# Altium PCB UWBNode.PcbDoc
Units mil, origin at the board's own origin, x right, y up, seen from the top; angles counter-clockwise.
Board outline 1377.96 x 1377.95 mil, 2 copper layers (Top Layer, Bottom Layer), stack 49.606 mil thick; 43 components, 60 nets, 227 pads, 157 vias.
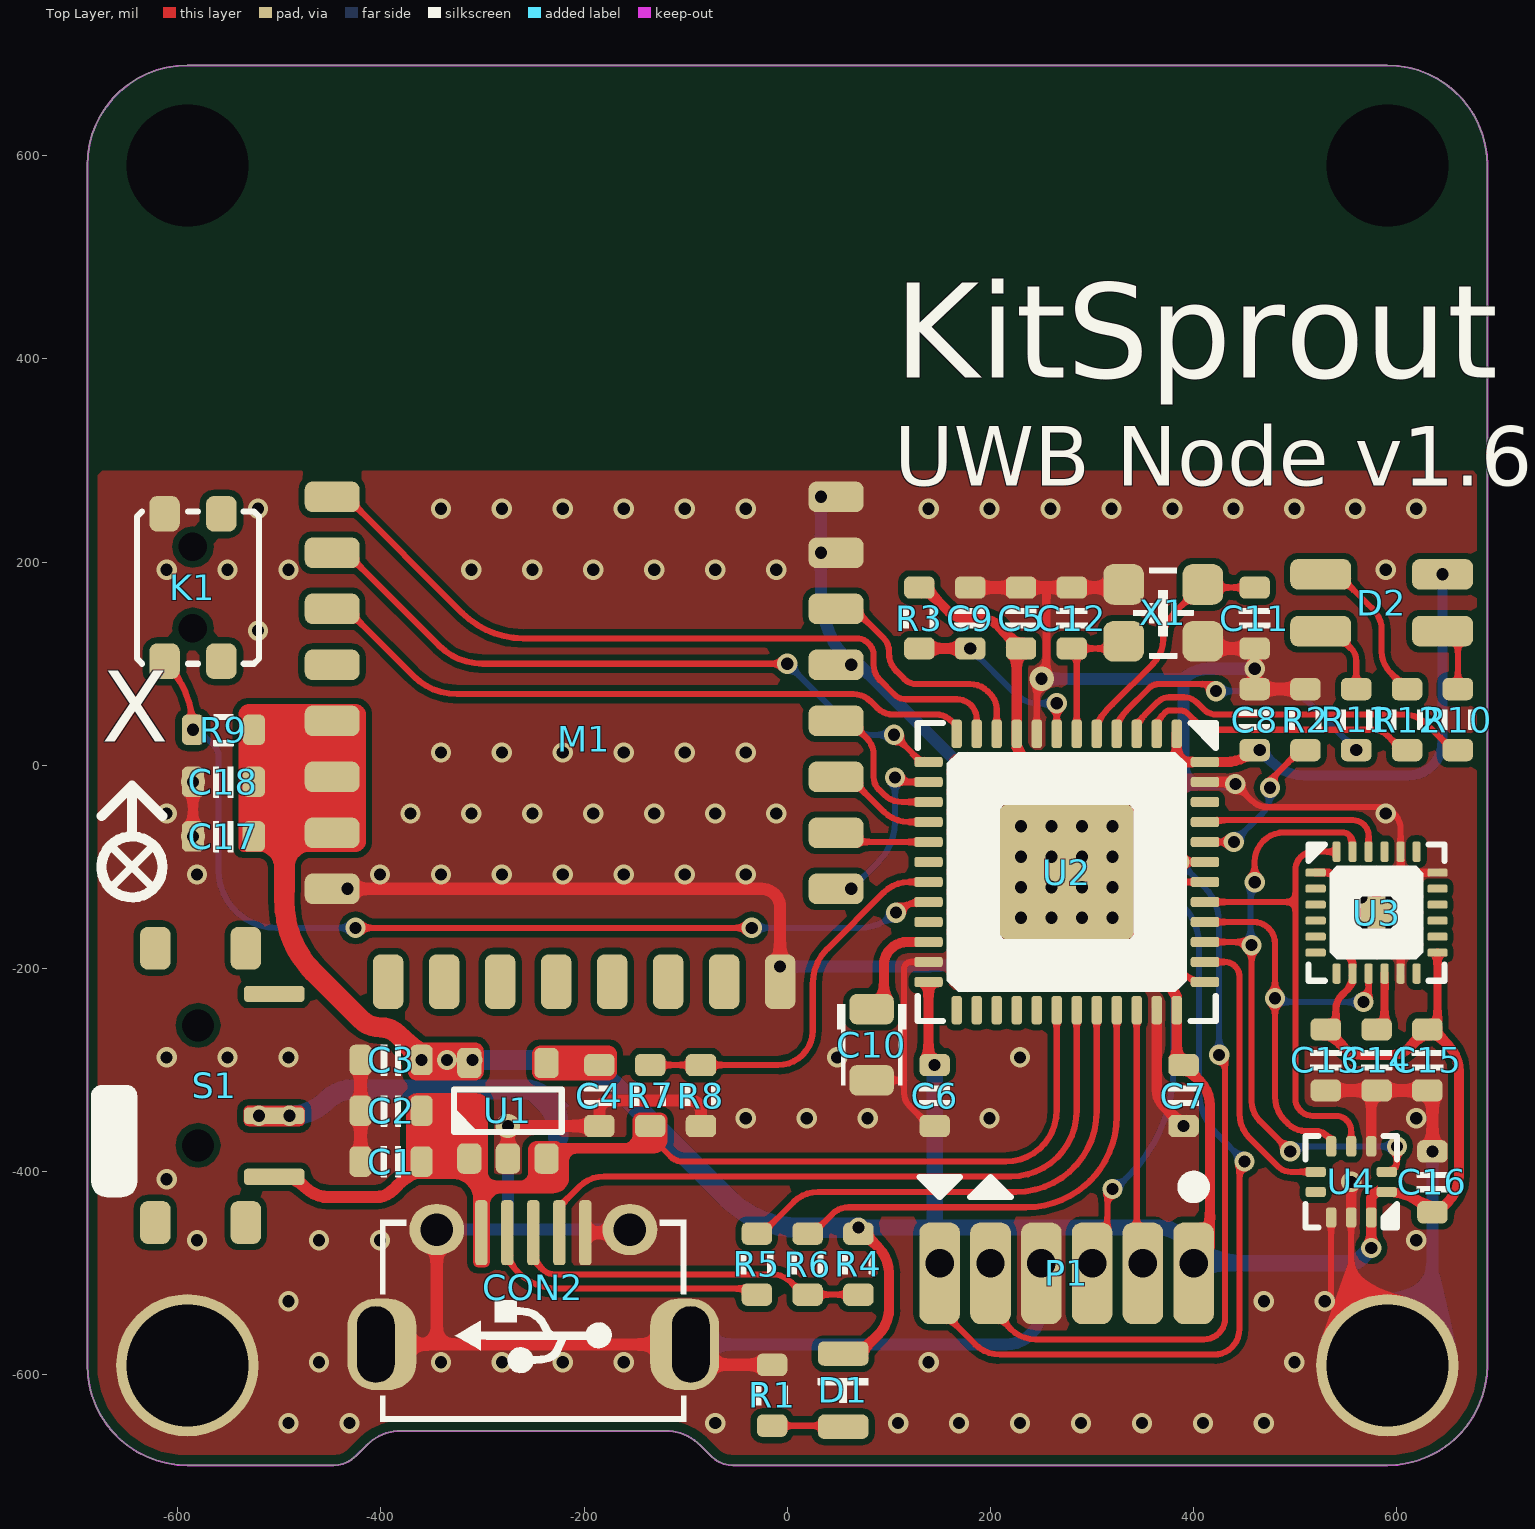
[diagram p0: Top Layer view]
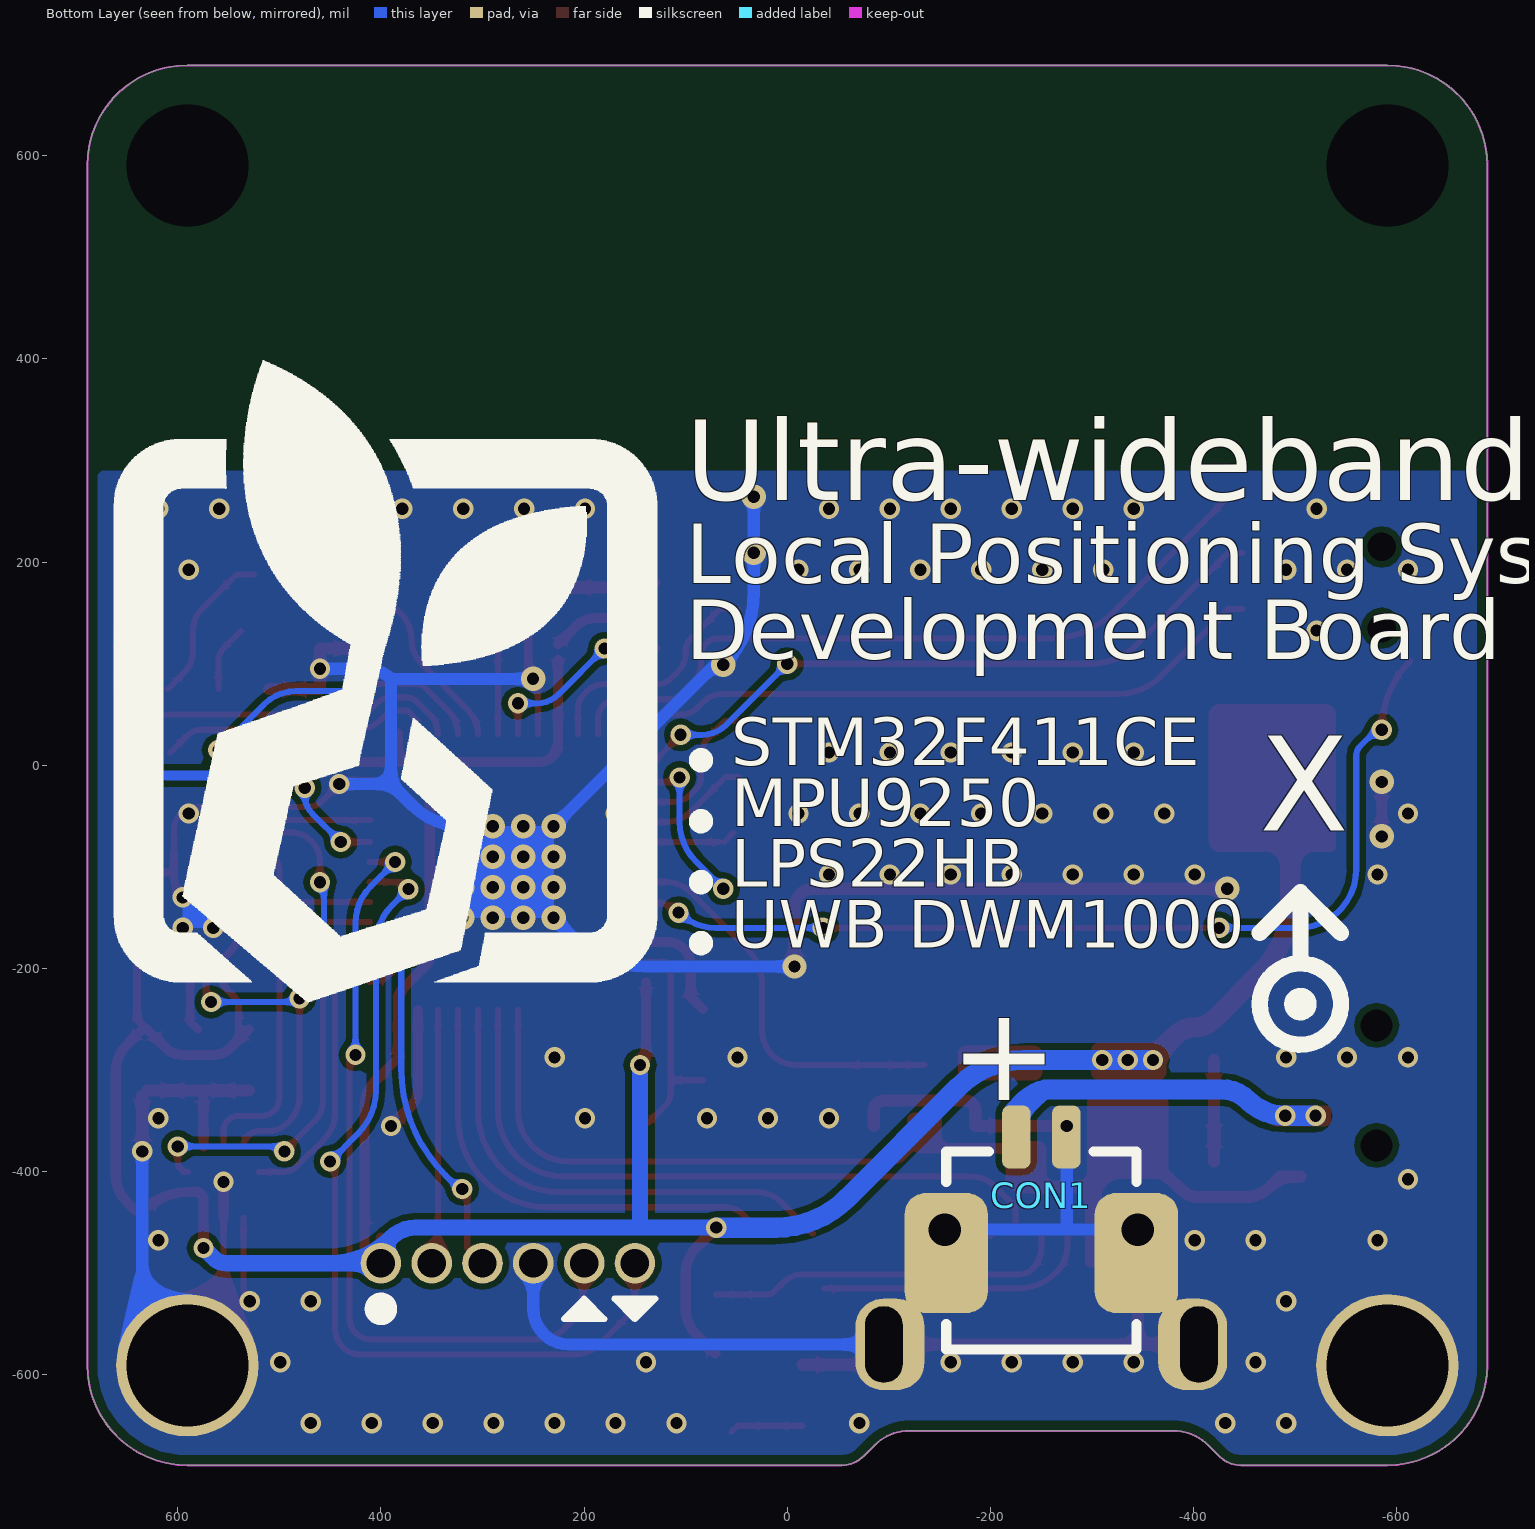
[diagram p1: Bottom Layer view, seen from below]
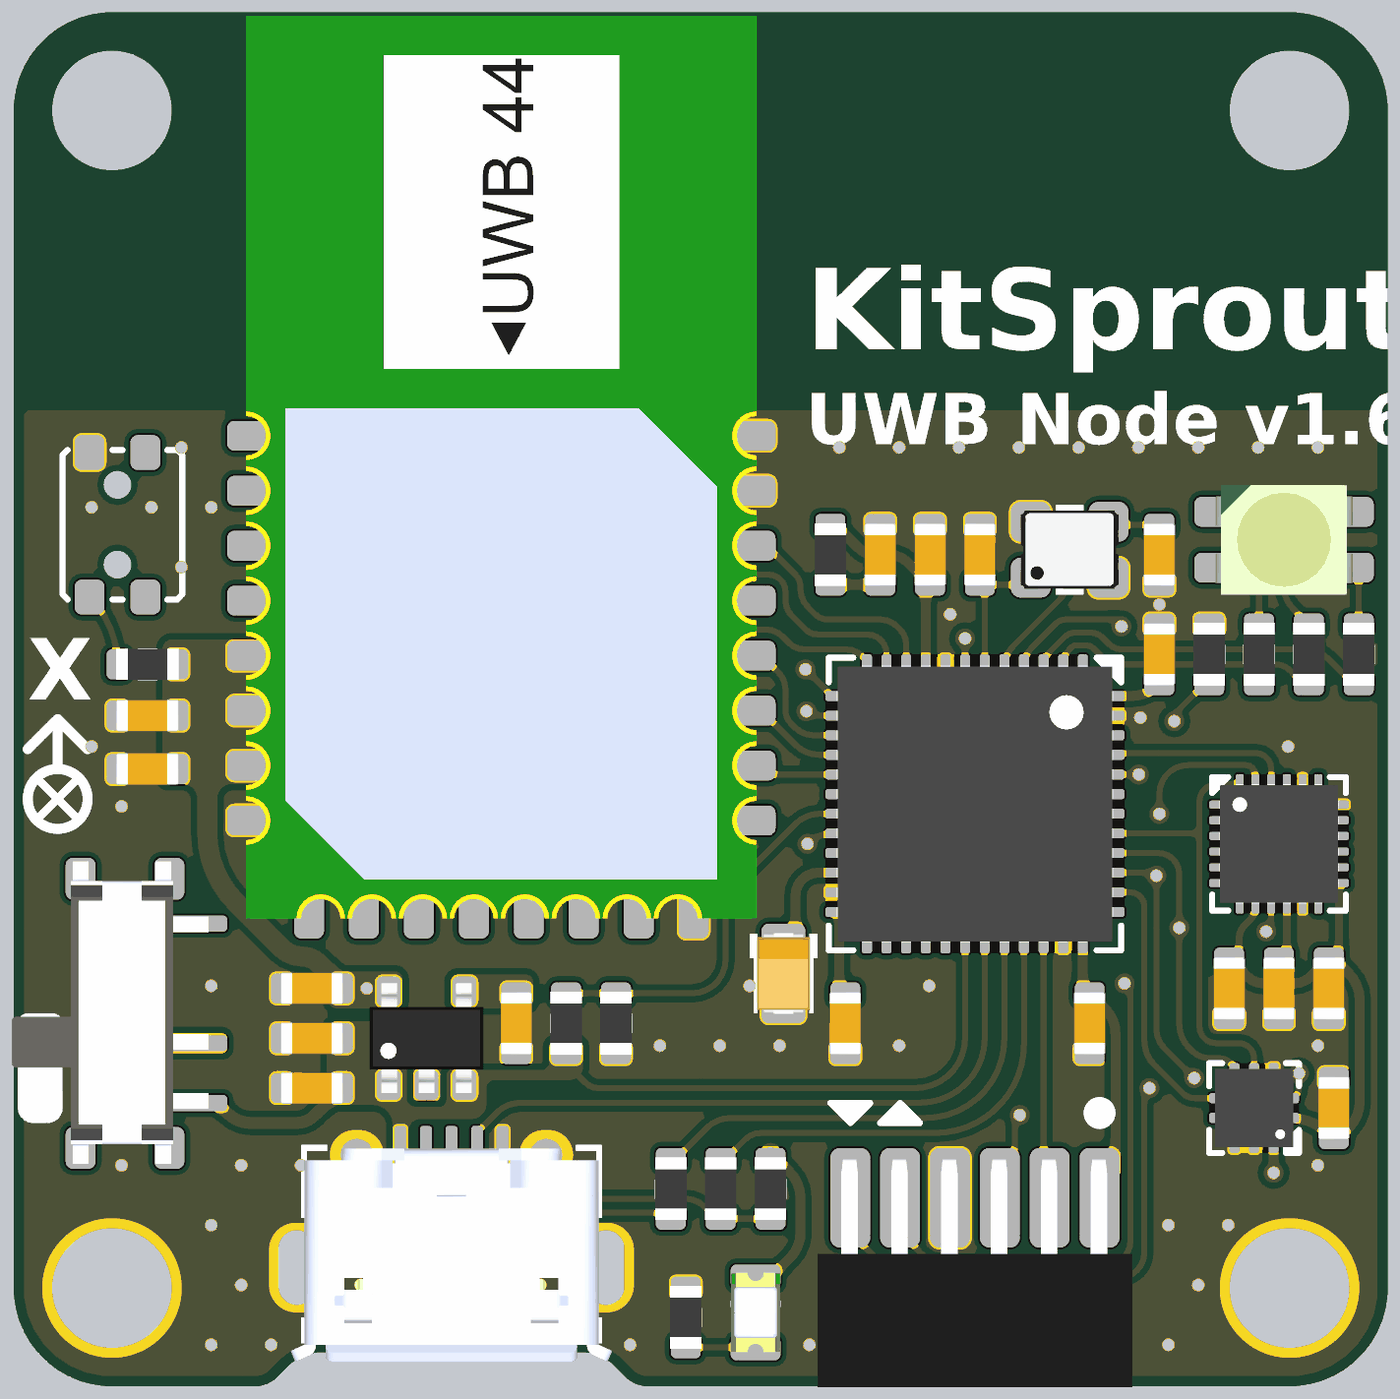
[diagram p2: 3D render of the assembled board from above, using the file's embedded part models]

## Layer stack, top to bottom
Top Solder: solder mask 0.3937, Solder Resist, Dk 3.5
Top Layer: signal copper 1.1811
Dielectric 1: dielectric 47.2441, FR-4, Dk 4.8
Bottom Layer: signal copper 1.1811
Bottom Solder: solder mask 0.3937, Solder Resist, Dk 3.5

## Board outline
-590.55,-688.98 -446.67,-688.98 ccw(c-446.67,-658.33) -425,-680 -414.14,-669.14 cw(c-380,-703.28) -380,-655 -120,-655 cw(c-120,-703.28) -85.86,-669.14 -75,-680 ccw(c-53.33,-658.33) -53.33,-688.98 590.55,-688.98 ccw(c590.55,-590.55) 688.98,-590.55 688.98,590.55 ccw(c590.55,590.55) 590.55,688.98 -590.55,688.98 ccw(c-590.55,590.55) -688.98,590.55 -688.98,-590.55 ccw(c-590.55,-590.55)

## Design rules (kind name [scope] priority, off if disabled: settings)
BoardOutlineClearance [All] p1: gap=10 ignorepadtopadclearanceinfootprint=FALSE except(0: Arc-SplitContinuation Track-SplitContinuation SMDPad-SplitContinuation THPad-SplitContinuation Via-SplitContinuation Fill-SplitContinuation Poly-SplitContinuation Region-SplitContinuation Text-SplitContinuation)
Clearance ClearancePolygon [InPolygon] p1: gap=6 ignorepadtopadclearanceinfootprint=FALSE except(0: SMDPad-Hole THPad-Hole Via-Hole Fill-Hole Poly-Hole Region-Hole Text-Hole; 8: THPad-Fill)
Clearance [All] p2: gap=6 ignorepadtopadclearanceinfootprint=FALSE except(0: Arc-Hole Track-Hole SMDPad-Hole THPad-Hole Via-Hole Fill-Hole Poly-Hole Region-Hole Text-Hole)
ComponentClearance [All] p1: gap=0 collisioncheckmode=3 verticalgap=0 showdistances=FALSE
Height [All] p1: minheight=0 maxheight=5000 prefheight=500
HoleSize [All] p1: absolutevalues=TRUE maxlimit=200 minlimit=1 maxpercent=80.000 minpercent=20.000
HoleToHoleClearance [All] p1: gap=6 allowstackedmicrovias=TRUE
MinimumAnnularRing [All] p1: minimumring=4
MinimumSolderMaskSliver [All] p1: minsoldermaskwidth=0
PolygonConnect [All] p1: connectstyle=Direct reliefconductorwidth=10 reliefentries=4 polygonreliefangle="90 Angle" airgapwidth=10
RoutingVias [All] p1: holewidth=12 width=24 viastyle="Through Hole" minholewidth=12 minwidth=20 maxholewidth=28 maxwidth=50
SilkToSilkClearance [All] p1: silktosilkclearance=0
SilkToSolderMaskClearance [IsPad] p1: minsilkscreentomaskgap=0 clearancetoexposedcopper=TRUE
SolderMaskExpansion [All] p1: expansion=2
Width [All] p1: maxlimit=100 minlimit=6 preferedwidth=10
23 further rules are at their usual default settings.

## Classes and differential pairs
component class "[06] ULTRA WIDEBAND": C17 C18 M1
component class "[05] INERTIAL SENSOR": C13 C14 C15 C16 U3 U4
component class "[04] MICROCONTROLLER": C5 C6 C7 C8 C9 C10 C11 C12 CON2 D2 K1 P1 R2 R3 R4 R5 R6 R7 R8 R9 R10 R11 R12 U2 X1
component class "[03] POWER": C1 C2 C3 C4 CON1 D1 R1 U1

## Components (designator, comment, footprint, x,y, rotation, side; value= is the part's Value field where it differs from the comment)
C1 "10uF" CAP_0603 -390,-390 r0 top
C2 "2.2uF" CAP_0603 -390,-340 r0 top
C3 "2.2uF" CAP_0603 -390,-290 r0 top
C4 "10nF" CAP_0603 -185,-325 r90 top
C5 "0.1uF" CAP_0603 230,145 r270 top
C6 "0.1uF" CAP_0603 145,-325 r90 top
C7 "0.1uF" CAP_0603 390,-325 r90 top
C8 "0.1uF" CAP_0603 460,45 r270 top
C9 "0.1uF" CAP_0603 180,145 r270 top
C10 "2.2uF" CAP_TAN_P0805 83,-275 r270 top
C11 "10pF" CAP_0603 460,145 r90 top
C12 "10pF" CAP_0603 280,145 r270 top
C13 "10nF" CAP_0603 530,-290 r90 top
C14 "0.1uF" CAP_0603 580,-290 r90 top
C15 "0.1uF" CAP_0603 630,-290 r90 top
C16 "0.1uF" CAP_0603 635,-410 r270 top
C17 "10uF" CAP_0603 -555,-70 r0 top
C18 "1uF" CAP_0603 -555,-16.34 r0 top
CON1 "MX1.25_2P" MX1.25_S90_2P -250,-480 r180 bottom
CON2 "MicroUSB" USB_Micro-AB -250,-560 r180 top locked
D1 "WHITE" LED_0805_YELLOW 55,-615 r270 top
D2 "RGB" LED_3528_RGB 585,160 r0 top
K1 "ButtonTACT" ButtonTACT_3.4*3.5_90 -585,175 r90 top
M1 "DWM1000" DWM1000 -200,-220 r0 top locked
P1 "DIP 1x6" HDR1X6_1.27_180HF 400,-500 r270 top value=1.27
R1 "1K" RES_0603 -15,-620 r270 top
R2 "10K" RES_0603 510,45 r270 top
R3 "10K" RES_0603 130,145 r90 top
R4 "1.5K" RES_0603 70,-491 r90 top
R5 "22R" RES_0603 -30,-491 r90 top
R6 "22R" RES_0603 20,-491 r90 top
R7 "4.7K" RES_0603 -135,-325 r270 top
R8 "4.7K" RES_0603 -85,-325 r90 top
R9 "10K" RES_0603 -555,35 r0 top
R10 "680R" RES_0603 660,45 r90 top
R11 "680R" RES_0603 560,45 r90 top
R12 "680R" RES_0603 610,45 r90 top
S1 "SPDT 3P" SwitchSPDT_2.8X6.6_90 -580,-315 r270 top
U1 "SP6205" SOT23-5 -275,-340 r90 top
U2 "STM32F411CE" QFN_P0.5_48 275,-105 r270 top
U3 "MPU9250" QFN_P0.4_24 580,-145 r0 top
U4 "LPS22HB" HCLGA-2x2_10 555,-410 r180 top
X1 "16MHz" XT_2520_4 370,150 r0 top

## Footprints (in the part's own frame and the unit in brackets; to place one, negate y for a bottom-side part, rotate by r counter-clockwise, add the part's x,y. Pads: shape width x height; smd on the part's side, far side on the other; paste and mask are expansions set on the pad)
ButtonTACT_3.4*3.5_90 [mil]
  round 20 hole 28 unplated: 0(-40,0) 0(40,0)
  rrect50% 35x30 smd: 1(-72.5,28) 2(72.5,28) 3(-72.5,-28) NC(72.5,-28)
  silkscreen extent -75,-65 75,55
CAP_0603 [mil]
  rrect50% 22x30 smd: 1(-30,0) 2(30,0)
  silkscreen extent -10,-15 10,15, body extent -31,-16 31,16, height 31
CAP_TAN_P0805 [mil]
  rrect50% 30x44 smd: 1(-35,0) 2(35,0)
  silkscreen extent -40,-34 40,34, body extent -40,-27 40,27, height 59
DWM1000 [mil]
  rrect50% 54x30 smd: 1(-248,484.25) 2(-248,429.13) 3(-248,374.02) 4(-248,318.9) 5(-248,263.78) 6(-248,208.66) 7(-248,153.54) 8(-248,98.43) 17(248,98.43) 18(248,153.54) 19(248,208.66) 20(248,263.78) 21(248,318.9) 22(248,374.02) 23(248,429.13) 24(248,484.25)
  rrect50% 30x54 smd: 9(-192.91,7) 10(-137.8,7) 11(-82.68,7) 12(-27.56,7) 13(27.56,7) 14(82.68,7) 15(137.8,7) 16(192.91,7)
  body extent -256,0 256,906, height 114
HCLGA-2x2_10 [mil]
  rrect50% 20x10 smd: 1(-35,9.84) 2(-35,-9.84) 6(35,-9.84) 7(35,9.84)
  rrect50% 10x20 smd: 3(-19.69,-35) 4(0,-35) 5(19.68,-35) 8(19.68,35) 9(0,35) 10(-19.69,35)
  silkscreen extent -45,-45 45,45, body extent -39,-39 39,39, height 31
HDR1X6_1.27_180HF [mil]
  rrect50% 100x40 smd: 1(0,0) 2(0,-50) 3(0,-100) 4(0,-150) 5(0,-200) 6(0,-250)
  body extent -38,-283 190,33, height 71
LED_0805_YELLOW [mil]
  rrect50% 24x50 smd: 1(-36,0) 2(36,0)
  silkscreen extent -12,-25 12,24, body extent -40,-25 40,25, height 43
LED_3528_RGB [mil]
  rrect50% 60x30 smd: 1(-60,28) 2(-60,-28) 3(60,-28) 4(60,28)
  body extent -69,-55 69,55, height 75
MX1.25_S90_2P [mil]
  rrect50% 82x118 smd: 0(-93.58,0) 0(93.58,0)
  rrect50% 28x62 smd: 1(-24.61,114) 2(24.61,114)
  silkscreen extent -94,-95 94,100, body extent -147,-129 147,135, height 98
QFN_P0.4_24 [mil]
  rrect50% 20x8 smd: 1(-60,39.37) 2(-60,23.62) 3(-60,7.87) 4(-60,-7.87) 5(-60,-23.62) 6(-60,-39.37) 13(60,-39.37) 14(60,-23.62) 15(60,-7.87) 16(60,7.87) 17(60,23.62) 18(60,39.37)
  rrect50% 8x20 smd: 7(-39.37,-60) 8(-23.62,-60) 9(-7.87,-60) 10(7.87,-60) 11(23.62,-60) 12(39.37,-60) 19(39.37,60) 20(23.62,60) 21(7.87,60) 22(-7.87,60) 23(-23.62,60) 24(-39.37,60)
  rrect20% 32x32 smd: 25(0,0)
  silkscreen extent -67,-67 67,67, body extent -60,-60 60,60, height 39
QFN_P0.5_48 [mil]
  rrect50% 28x10 smd: 1(-136,108.27) 2(-136,88.58) 3(-136,68.9) 4(-136,49.21) 5(-136,29.53) 6(-136,9.84) 7(-136,-9.84) 8(-136,-29.53) 9(-136,-49.21) 10(-136,-68.9) 11(-136,-88.58) 12(-136,-108.27) 25(136,-108.27) 26(136,-88.58) 27(136,-68.9) 28(136,-49.21) 29(136,-29.53) 30(136,-9.84) 31(136,9.84) 32(136,29.53) 33(136,49.21) 34(136,68.9) 35(136,88.58) 36(136,108.27)
  rrect50% 10x28 smd: 13(-108.27,-136) 14(-88.58,-136) 15(-68.9,-136) 16(-49.21,-136) 17(-29.53,-136) 18(-9.84,-136) 19(9.84,-136) 20(29.53,-136) 21(49.21,-136) 22(68.9,-136) 23(88.58,-136) 24(108.27,-136) 37(108.27,136) 38(88.58,136) 39(68.9,136) 40(49.21,136) 41(29.53,136) 42(9.84,136) 43(-9.84,136) 44(-29.53,136) 45(-49.21,136) 46(-68.9,136) 47(-88.58,136) 48(-108.27,136)
  rrect10% 132x132 smd: 49(0,0)
  silkscreen extent -147,-147 147,147, body extent -139,-139 139,139, height 22
RES_0603 [mil]
  rrect50% 22x30 smd: 1(-30,0) 2(30,0)
  silkscreen extent -10,-16 10,16, body extent -31,-16 31,16, height 18
SOT23-5 [mil]
  rrect50% 30x24 smd: 1(-47,38) 2(-47,0) 3(-47,-38) 4(47,-38) 5(47,38)
  silkscreen extent -21,-53 21,53, body extent -55,-57 55,57, height 57
SwitchSPDT_2.8X6.6_90 [mil]
  rrect50% 42x30 smd: 0(-135,-42) 0(-135,47) 0(135,-42) 0(135,47)
  round 10 hole 31.5: 0(-59.06,0) 0(59.06,0)
  rrect50% 16x60 smd: 1(90,75) 2(30,75) 3(-90,75)
  body extent -152,-111 151,86, height 55
USB_Micro-AB [mil]
  rrect80% 68x90 hole 37 slot 75 at 90 deg copper offset 6,0 mask+0: 0(-155,10)
  oval 54x50 hole 32 mask+0: 0(-95,-103) 0(95,-103)
  rrect80% 68x90 hole 37 slot 75 at 90 deg copper offset -6,0 mask+0: 0(155,10)
  rrect50% 12x64 smd: 1(51.18,-100) 2(25.59,-100) 3(0,-100) 4(-25.59,-100) 5(-51.18,-100)
  silkscreen extent -150,-113 151,86, body extent -161,-109 161,104, height 108
XT_2520_4 [mil]
  rrect50% 40x40 smd: 1(39,28) 2(-39,28) 3(-39,-28) 4(39,-28)
  silkscreen extent -30,-44 30,44, body extent -49,-39 49,39, height 31

## Part data
C1 C2 C3 C4 C5 C6 C7 C8 C9 C11 C12 C13 C14 C15 C16 C17 C18: library part Cap_0603, "Capacitor", Type=0603
C10: library part Cap_Tan_0805, "Capacitor Tantalum", Type=0805
CON1: "MX"
CON2: library part USB_Micro, "USB"
D1: library part LED_0805, "LED", Type=0805
D2: library part LED_3528_RGB, "LED", Type=3528
K1: "Button"
M1: "Module", Current - Receiving=64mA, Current - Transmitting=31mA, Frequency="3.5GHz ~ 6.5GHz", Manufacturer="Decawave Limited", Operating Temperature="-40¢XC ~ 85¢XC", Power - Output=-, Supplier Part Number 1=1479-1002-1-ND, Voltage - Supply="2.8 V ~ 3.6 V", Antenna Type="Integrated, Chip", Category="RF/IF and RFID", ComponentLink1Description=http://www.decawave.com/sites/default/files/product-pdf/dwm1000-product-brief.pdf, ComponentLink1URL=http://www.decawave.com/sites/default/files/product-pdf/dwm1000-product-brief.pdf, Data Rate=6.8Mbps, Manufacturer Part Number=DWM1000, Memory Size=-, Modulation=-, Mounting Type="Surface Mount", Package / Case=Module, Packaging="Cut Tape (CT)", Pricing 1="1=32.16, 10=26.704, 100=24.24, 250=22.51296 (USD)", Protocol=-, RF Family/Standard=802.15.4, RoHS="RoHS Compliant", Sensitivity=-, Serial Interfaces=SPI, Stock 1=1028, Supplier 1=Digi-Key
P1: library part HDR1x6_1.27T, "Header", Type="DIP 1x6"
R1 R2 R3 R4 R5 R6 R7 R8 R9 R10 R11 R12: library part Res_0603, "Resistor", Type=0603
S1: library part SwitchSPDT_2.8x6.6_90, "Switch", Type=SPDT
U1: "Power", Type=SOT23-5
U2: library part STM32F4x1C, "MCU", Type="QFN48 P0.5"
U3: library part MPU925x, "Sensor Motion", Type="QFN24 P0.4"
U4: "Sensor Pressure", Type="LGA10 P0.5"
X1: library part XTAL_2520_4P, "Crystal Oscillator", Type=XTAL2520

## Free pads (board coordinates)
  round 140 hole 120 mask+0: 0(-590.55,-590.55) 0(590.55,-590.55)
  round 115 hole 120 unplated mask+0: 0(-590.55,590.55) 0(590.55,590.55)
  round 40 hole 28: 0(150,-490) 0(200,-490) 0(250,-490) 0(300,-490) 0(350,-490) 0(400,-490)

## Via types
v1: diameter 20, hole 12, Top Layer to Bottom Layer, tented both sides, 132 vias
v2: diameter 24, hole 12, Top Layer to Bottom Layer, tented both sides, 25 vias

## Nets (pads, with @x,y where several pads share a name; then routed paths per layer and width w, separated by ;. In a path a pad name is that pad's centre, name@x,y a point inside that pad or via, vN(x,y) a via of type N, cw(c..) or ccw(c..) an arc to the next point about the centre after c; other vN are vias at no path point)
+3V3: C3.2 C5.2 C6.2 C7.2 C8.2 C13.2 C15.2 C16.2 C17.2 C18.2 D1.1 D2.4 M1.5 M1.6 M1.7 P1.1 pad.0@400,-490 R3.2 R4.2 R9.2 U1.5 U2.1 U2.9 U2.24 U2.36 U2.48 U3.1 U3.8 U3.13 U4.1 U4.10 | length 4200.9
  Top Layer w7: C13.2 540,-260 540,-240 cw(c559.31,-240) 545.66,-226.34 551,-221 ccw(c538.02,-208.02) U3.8@556.38,-208.02
  Top Layer w8: U3.1 531.22,-105.63 cw(c531.22,-114.41) 540,-114.41 540,-163.42 ccw(c567.96,-163.42) 548.19,-183.19 552,-187 cw(c541.43,-197.57) U3.8@556.38,-197.57 ; C15.2@635,-260 C15.2 640,-250 U3.13
  Top Layer w10: v1(-360,-290) v1(-335,-290) -316,-290 cw(c-316,-293) U1.5 ; v1(70,-455) 89.5,-474.5 ; D1.1@71,-579 89.5,-560.5 ccw(c64.15,-535.15) 100,-535.15 ; 89.53,-474.53 cw(c64.15,-499.85) 100,-499.85 100,-540.15 ; R3.2@130,180 158.64,151.36 ccw(c174,166.73) 174,145 188.69,145 cw(c188.69,117.69) 207.99,137.01 C5.2@225.79,119.21 ; U2.24 139,-289 v1(145,-295) ; C5.2@225.79,104.21 U2.9 225.79,21.74 ccw(c244.26,21.74) 244.26,3.27 383.27,3.27 ; 352,0.27 352,-189 ccw(c362,-189) 354.93,-196.07 377.54,-218.69 cw(c363.73,-232.5) 383.27,-232.5 U2.36 383.27,-288.27 C7.2 406.1,-311.1 cw(c382.2,-335) 416,-335 416,-474 pad.0@400,-490 ; U2.1 383.27,3.27 ; P1.1 pad.0@400,-490 ; P1.1@400,-465 pad.0@400,-490 ; C8.2 cw(c431.68,43.32) 445.87,5.87 cw(c431.68,43.32) 431.68,3.27 U2.48 383.27,3.27 ; C13.2 547.93,-277.93 ccw(c565,-260.86) 565,-285 595,-285 ccw(c595,-260.86) 612.07,-277.93 C15.2 ; v1(574.69,-475) U4.10 574.69,-427.12 cw(c581.96,-427.12) 581.96,-419.84 U4.1 cw(c590,-479.82) 632.39,-437.39 C16.2 ccw(c635,-427.93) 643.54,-436.46 650,-430 ccw(c623.44,-403.44) 661,-403.44 661,-301.56 ccw(c623.44,-301.56) 650.03,-275.03 ; C15.2@635,-260 650,-275
  Top Layer w16: C17.2@-525,-65 -449.46,-65 cw(c-449.46,-66.46) M1.7 ; C18.2@-525,-11.34 M1.6 ; -495,-66.46 M1.7 ; M1.5 M1.6 ; M1.7 M1.6
  Top Layer w20: -495,-66.46 -495,-133.58 ccw(c-395,-133.58) -465.71,-204.29 -420.49,-249.51 ccw(c-400,-229.03) -400,-258 cw(c-400,-282.14) -382.93,-265.07 C3.2@-360,-288
  Bottom Layer w10: v1(465,15) 476.37,3.63 ccw(c509.27,36.53) 509.27,-10 610.86,-10 ccw(c610.86,24.14) 645,24.14 v1(645,188)
  Bottom Layer w16: v1(70,-455) 365.86,-455 cw(c365.86,-489.14) 390,-465 ccw(c450.36,-404.64) 450.36,-490 ; 145,-450 v1(145,-295) ; pad.0@400,-490 450.36,-490 ; v1(574.69,-475) 564.83,-484.83 cw(c552.35,-472.33) 552.35,-490 450.36,-490
  Bottom Layer w20: v1(-360,-290) v1(-335,-290) v1(-310,-290) -232.5,-290 cw(c-232.5,-380.53) -168.48,-316.52 -59.29,-425.71 ccw(c11.42,-355) 11.42,-455 v1(70,-455)
+VBAT: CON1.1 S1.2 | length 334
  Bottom Layer w20: v1(-520,-345) v1(-490,-345) ccw(c-490,-293.79) -453.79,-330 cw(c-427.23,-356.56) -427.23,-319 -259.24,-319 cw(c-259.24,-352.84) -225.39,-352.84 CON1.1
+VIN: C1.2 C2.2 CON2.1 R7.2 S1.1 U1.1 U1.3 U2.30 | length 1043
  Top Layer w6: R7.2@-135,-365 -115,-385 ccw(c-102.93,-372.93) -102.93,-390 215,-390 ccw(c215,-339.84) 265.16,-339.84 U2.30
  Top Layer w8: U1.3@-227,-377 -157,-377 -145,-365 R7.2@-135,-365
  Top Layer w12: S1.1 S1.1@-499.14,-405 ; -474.98,-415.02 ccw(c-450.86,-390.86) -450.86,-425 -405,-425 ccw(c-405,-400.86) -387.93,-417.93 -382.68,-412.68 cw(c-340,-455.36) -340,-395 ; C1.2 C2.2 ; U1.1 -301.18,-398.82 -301.18,-415 ; CON2.1 -301.18,-415 ; -232.5,-403.5 -244,-415 -301.18,-415 ; S1.1@-499.14,-405 cw(c-499.14,-439.14) -475,-415 -485,-405 S1.1@-499.14,-405
AUX_CL: U3.7
AUX_DA: U3.21
BAT_ADC: R7.1 R8.2 U2.19 | length 389
  Top Layer w6: R7.1 -9.14,-295 ccw(c-9.14,-260.86) 25,-260.86 25,-215 cw(c73.28,-215) 39.12,-180.88 ; 39.14,-180.86 95.01,-124.99 cw(c119.52,-149.52) 119.52,-114.84 U2.19
BOOT: R2.2 U2.44 | length 150
  Top Layer w6: U2.44 v1(439.53,-75.47) ; v1@475,-21 475,-15 505,15 R2.2
  Bottom Layer w6: v1(439.53,-75.47) 467.5,-47.5 ccw(c449.39,-29.39) 475,-29.39 v1(475,-22) v1@475,-21
D+: CON2.2 R5.1 | length 275.1
  Top Layer w6: CON2.2 -275.59,-473.43 ccw(c-239.43,-473.43) -265,-499 ccw(c-226.37,-460.37) -226.37,-515 R5.1@-36,-515
D-: CON2.3 R4.1 R6.1 | length 357.4
  Top Layer w6: CON2.3 -250,-474.27 ccw(c-219.27,-474.27) -241,-496 ccw(c-228.93,-483.93) -228.93,-501 -15.31,-501 cw(c-15.31,-528.31) 3.99,-508.99 13.17,-518.17 ccw(c20,-511.34) R6.1 R4.1
GND: C1.1 C2.1 C3.1 C4.1 C5.1 C6.1 C7.1 C8.1 C9.1 C10.2 C11.1 C12.1 C13.1 C14.1 C15.1 C16.1 C17.1 C18.1 CON1.0 CON1.2 CON2.0 CON2.5 K1.2 M1.8 M1.16 M1.21 M1.23 M1.24 P1.4 pad.0@250,-490 pad.0@590.55,-590.55 pad.0@-590.55,-590.55 R1.1 R2.1 R8.1 U1.2 U2.8 U2.23 U2.35 U2.47 U2.49 U3.11 U3.18 U3.20 U3.25 U4.3 U4.8 U4.9 X1.2 X1.4 | length 5304.9
  Top Layer w6: CON2.0@-162.24,-460 ccw(c-162.24,-449.76) CON2.0@-155,-457 ; CON2.0@-95,-570 CON2.0@-75,-590 ; C10.2 115,-310 ; C6.1@136.46,-351.46 120,-335 cw(c132.07,-322.93) 115,-322.93 115,-310 ; U2.23 121.42,-193.58 ccw(c121.42,-200) 115,-200 115,-310 ; U2.8 245.47,80.47 v2(250.24,85.24) v2@255,90 ; X1.2@328,175 X1.2 ; X1.4 X1.4@416,115 ; v1(441,-18.42) 457.79,-35.21 ccw(c471.77,-21.23) 471.77,-41 581.62,-41 cw(c581.62,-63) 603.62,-63 U3.20 ; U4.8 535.32,-521.4 ccw(c568.92,-521.4) 545.16,-545.16 pad.0@555,-555 ; U4.9 pad.0@555,-555 ; pad.0@590.55,-590.55 pad.0@555,-555 ; v1@595.58,-160.58 v1(595,-160) U3.25 v1(595,-130) v1@595.58,-129.42 ; C15.1 C15.1@635,-325 ; v1(635,-380) C16.1@640,-380
  Top Layer w8: v2@255,90 255,175 ; v1@595.58,-160.58 cw(c576.15,-180) 603.62,-180 U3.11 ; v1@595.58,-129.42 ccw(c576.15,-110) 603.62,-110 603.62,-105.63 ; U3.20 603.62,-105.63 ; U3.18 603.62,-105.63
  Top Layer w10: v2(-585,-70) v2(-585,-16.34) ; U2.49 v2(290,-90) v2(320,-60) ; U2.35 363.58,-319.51 ccw(c385.49,-319.51) 370,-335 v1(390,-355) ; U2.47 v1@441,-16.42 ; U4.9 v1(555,-410) ; U4.3 574.69,-325.31 C14.1
  Top Layer w12: v2(-433,-121.57) -340.94,-121.57 -100.94,-121.57 -25.43,-121.57 cw(c-25.43,-139.92) -7.09,-139.92 v2(-7.09,-198) ; C1.1 C2.1 C3.1 ; CON2.0@-405,-570 -345,-570 ; CON2.0@-345,-457 -345,-570 ; U1.2 v2(-275,-355) C4.1 -185,-340 cw(c-175,-340) -175,-330 -95.24,-330 cw(c-95.24,-340.24) -85,-340.24 R8.1 ; CON2.5 CON2.0@-162.24,-460 ; CON2.0@-95,-570 -345,-570 ; CON2.0@-75,-590 R1.1 ; C9.1 C5.1 255,175 C12.1 X1.2@328,175 ; X1.4@416,115 C11.1 v1(460,95) C8.1 R2.1 ; C13.1 C14.1 C15.1 ; v1(635,-380) C15.1@635,-325
  Bottom Layer w6: v2@62.29,99.61 v2(63,98.9) v2@71.1,98.9 ; pad.0@590.55,-590.55 pad.0@635,-546.1
  Bottom Layer w12: CON2.0@-345,-457 -275,-457 ; v2(-275,-355) -275,-457 ; CON2.0@-155,-457 -275,-457 ; CON2.0@-95,-570 215,-570 ccw(c215,-535) 250,-535 pad.0@250,-490 ; v2(-7.09,-198) 140.58,-198 ccw(c140.58,-98) 211.29,-168.71 v2(230,-150) ; v2(33,264.25) v2(33,209.13) 33,170.32 ccw(c133,170.32) v2@62.29,99.61 ; v2@71.1,98.9 v2(230,-60) ; v2@250.24,85 390,85 ; v2(320,-60) ccw(c320,8.28) 368.28,-40 ; 368.35,-40.07 390,-18.42 ; v1(441,-18.42) 390,-18.42 ; v1(460,95) 414.14,95 ccw(c414.14,60.86) 390.02,85.02 ; pad.0@635,-546.1 v1(635,-380) ; 390,-18.42 390,85
  other v1: -490.94,-647.44 -430.94,-647.44 -70.94,-647.44 109.06,-647.44 169.06,-647.44 229.06,-647.44 289.06,-647.44 349.06,-647.44 409.06,-647.44 469.06,-647.44 -460.94,-587.44 -340.94,-587.44 -280.94,-587.44 -220.94,-587.44 -160.94,-587.44 139.06,-587.44 499.06,-587.44 -490.94,-527.44 469.06,-527.44 529.06,-527.44 -580.94,-467.44 -460.94,-467.44 -400.94,-467.44 619.06,-467.44 -610.94,-407.44 -40.94,-347.44 19.06,-347.44 79.06,-347.44 199.06,-347.44 619.06,-347.44 -610.94,-287.44 -550.94,-287.44 -490.94,-287.44 49.06,-287.44 229.06,-287.44 169.06,-167.44 565,-160 565,-130 -580.94,-107.44 -400.94,-107.44 -340.94,-107.44 -280.94,-107.44 -220.94,-107.44 -160.94,-107.44 -100.94,-107.44 -40.94,-107.44 -610.94,-47.44 -370.94,-47.44 -310.94,-47.44 -250.94,-47.44 -190.94,-47.44 -130.94,-47.44 -70.94,-47.44 -10.94,-47.44 169.06,-47.44 589.06,-47.44 -340.94,12.56 -280.94,12.56 -220.94,12.56 -160.94,12.56 -100.94,12.56 -40.94,12.56 -520.94,132.56 -610.94,192.56 -550.94,192.56 -490.94,192.56 -310.94,192.56 -250.94,192.56 -190.94,192.56 -130.94,192.56 -70.94,192.56 -10.94,192.56 589.06,192.56 -520.94,252.56 -340.94,252.56 -280.94,252.56 -220.94,252.56 -160.94,252.56 -100.94,252.56 -40.94,252.56 139.06,252.56 199.06,252.56 259.06,252.56 319.06,252.56 379.06,252.56 439.06,252.56 499.06,252.56 559.06,252.56 619.06,252.56
  other v2: 260,-150 290,-150 320,-150 230,-120 260,-120 290,-120 320,-120 230,-90 260,-90 320,-90 260,-60 290,-60
ID: CON2.4 U2.31 | length 681.5
  Top Layer w6: CON2.4 -224.41,-434.41 -204.84,-414.84 cw(c-180.32,-439.36) -180.32,-404.69 220,-404.69 ccw(c220,-339.84) 284.84,-339.84 U2.31
IMU_CSB: U2.38 U4.6 | length 281.8
  Top Layer w6: U2.38 430.64,-193.58 cw(c430.64,-207.94) 445,-207.94 445,-342.73 ccw(c479.14,-342.73) 454.98,-366.85 ; 455,-366.87 483.13,-395 ; 483.14,-395.01 ccw(c495.58,-382.55) 495.58,-400.16 U4.6
IMU_CSM: U2.45 U3.22 | length 186.3
  Top Layer w6: U2.45@410.21,-54 556.73,-54 cw(c556.73,-69.4) 572.13,-69.4 U3.22
IMU_IMTB: U4.7
IMU_INTM: U3.12
IMU_SCK: U2.39 U3.23 U4.2 | length 610.6
  Top Layer w6: U2.39 v1@451.95,-173.9 ; v1(456.95,-176.95) 457,-330.69 ccw(c484.31,-330.69) 464.99,-349.99 v1(495,-380) ; v1(460,-115) 460,-95 cw(c489,-95) 489,-66 546,-66 ; 546.38,-66 cw(c546.38,-76) 556.38,-76 U3.23 ; U4.2@595,-400.16 U4.2 ccw(c590,-390.16) 600,-390.16 v1(600,-375.16)
  Bottom Layer w6: v1@456,-176.95 v1@456,-115 ; v1(495,-380) 500,-375 599.84,-375 v1(600,-375.16)
IMU_SDI: U2.41 U3.24 U4.4 | length 453.1
  Top Layer w6: U2.41 500,-134.53 ; U3.24 518.14,-85 ccw(c518.14,-103.14) 500,-103.14 500,-134.53 ; U4.4 555,-360 ccw(c540,-360) 540,-345 517.07,-345 cw(c517.07,-327.93) 500,-327.93 500,-134.53
IMU_SDO: U2.40 U3.9 U4.5 | length 434.1
  Top Layer w6: U2.40 458.83,-154.21 cw(c458.83,-175.38) 480,-175.38 v1(480,-229.21) 480,-325.86 ccw(c514.14,-325.86) 489.98,-349.98 492.82,-352.82 ; 492.83,-352.83 ccw(c510.16,-335.48) 510.16,-360 520.31,-360 cw(c520.31,-375) U4.5 ; v1(567.13,-233) 572.13,-228 U3.9
  Bottom Layer w6: v1(480,-229.21) 483.79,-233 v1(567.13,-233)
KEY: K1.1 R9.1 U2.20 | length 959.2
  Top Layer w6: K1.1@-612.93,102.43 cw(c-680.36,35) v1(-585,35) ; v1(-425,-160) v1(-35,-160) ; v1(107.02,-144.98) cw(c132.28,-170.28) U2.20@132.28,-134.53
  Bottom Layer w6: v1@-585,40 -563.54,18.54 cw(c-572.07,10) -560,10 -560,-102.64 ccw(c-502.64,-102.64) -502.64,-160 v1(-425,-160) ; v1(-35,-160) 70.75,-160 ccw(c70.75,-108.71) v1(107.02,-144.98)
LED_B: R10.1 U2.3 | length 352.6
  Top Layer w6: U2.3 cw(c369.44,31) 351.38,49.06 364.79,62.47 cw(c375.72,51.55) 375.72,67 390.22,67 cw(c390.22,48.22) 403.5,61.5 410,55 ccw(c422.07,67.07) 422.07,50 607.27,50 cw(c607.27,19.27) 628.98,41.02 R10.1@657.5,12.5
LED_G: R11.1 U2.4 | length 281.9
  Top Layer w6: U2.4 cw(c356.11,31) 333.54,53.54 356,76 cw(c365.66,66.34) 365.66,80 v1@420,80
  Bottom Layer w6: v1(422,73) 483.62,73 cw(c483.62,28.62) 515,60 v1(560,15)
LED_R: R12.1 U2.2 | length 273
  Top Layer w6: U2.2 U2.2@363.58,37.34 ; U2.2@364.58,38.34 cw(c379.66,38.34) 369,49 372.59,52.59 cw(c376.02,49.17) 376.02,54.01 386.73,54.01 cw(c386.73,43.73) 394,51 400.1,44.9 ccw(c424,68.8) 408.16,38.94 ccw(c424,68.8) 424,35 576.51,35 cw(c576.51,14.51) 591,29 R12.1@607.5,12.5
NetC4_2: C4.2 U1.4 | length 52.8
  Top Layer w10: U1.4 C4.2@-187,-293
  Top Layer w12: C4.2@-187,-293 C4.2
NetD1_2: D1.2 R1.2 | length 72.5
  Top Layer w6: R1.2 49,-650 D1.2@55,-656
NetD2_1: D2.1 R12.2 | length 155.7
  Top Layer w6: D2.1 542,188 571.53,158.47 576.53,153.47 cw(c556.03,133) 585,133 585,112.02 ccw(c614.02,112.02) 593.49,91.51 R12.2
NetD2_2: D2.2 R11.2 | length 65.4
  Top Layer w6: D2.2@538,132 555,115 cw(c542.93,102.93) 560,102.93 R11.2
NetD2_3: D2.3 R10.2 | length 57
  Top Layer w6: R10.2 D2.3@660,132
PA8: U2.29
PB0: U2.18
PB9: U2.46
PB10: U2.21
PB12: U2.25
PB13: U2.26
PB14: U2.27
PB15: U2.28
PHA: M1.9
POL: M1.10
REG: C14.2 U3.10 | length 58.3
  Top Layer w8: C14.2 587.87,-252.13 U3.10
RST: C9.2 R3.1 U2.7 | length 186.2
  Top Layer w6: U2.7 v1(265.16,61)
  Top Layer w10: R3.1 v1(180,115)
  Bottom Layer w6: v1(180,115) 224.95,70.05 ccw(c246.79,91.89) 246.79,61 v1(265.16,61)
RX: M1.13
RXOK: M1.15
SFD: M1.14
SWCLK: P1.3 pad.0@300,-490 U2.37 | length 380.8
  Top Layer w6: pad.0@300,-490 315,-475 v1@315,-420 ; v1@374,-184 ccw(c386.07,-184) 377.54,-192.54 389.26,-204.26 ccw(c411,-182.53) U2.37
  Bottom Layer w6: v1@320,-420 336.67,-403.33 ; 336.74,-403.26 ccw(c232.08,-298.73) 380,-298.73 v1@380,-184
  other v1: 320,-417 373,-184
SWDIO: P1.2 pad.0@350,-490 U2.34 | length 289
  Top Layer w6: pad.0@343.9,-500 U2.34 ; P1.2 350,-490 pad.0@350,-470
TX: M1.12
UART_RX: P1.5 pad.0@200,-490 U2.43 | length 772.8
  Top Layer w6: P1.5 200,-506.72 ccw(c268.28,-506.72) 220,-555 ; 220.02,-555.02 ccw(c244.14,-530.86) 244.14,-565 410,-565 ccw(c410,-544.06) 430.94,-544.06 v1@430.94,-285.94 ; v1(386,-95.16) U2.43
  Bottom Layer w6: v1(386,-95.16) 410,-119.16 ; 410.01,-119.17 cw(c373.79,-155.37) 425,-155.37 v1(425,-285)
UART_TX: P1.6 pad.0@150,-490 U2.42 | length 866.4
  Top Layer w6: P1.6 150,-535 185,-570 ; 185.02,-570.02 ccw(c209.14,-545.86) 209.14,-580 420,-580 ccw(c420,-555) 445,-555 v1@445,-390 ; v1@371,-119.84 376,-114.84 U2.42
  Bottom Layer w6: v1@371,-119.84 v1(373,-121.84) 389,-137.84 cw(c350.37,-176.47) 405,-176.47 405,-320 ccw(c465.36,-320) 422.68,-362.68 v1(450,-390)
USB_DM: R5.2 U2.32 | length 489.9
  Top Layer w6: R5.2@-25,-461 6.1,-429.9 cw(c30,-453.8) 30,-420 225,-420 ccw(c225,-340.47) 304.53,-340.47 U2.32
USB_DP: R6.2 U2.33 | length 464.7
  Top Layer w6: R6.2@25,-461 44.5,-441.5 cw(c60.19,-457.19) 60.19,-435 235,-435 ccw(c235,-345.79) 286.05,-418.95 ccw(c235,-345.79) 308.16,-396.84 ccw(c235,-345.79) 324.21,-345.79 U2.33
UWB_CS: M1.17 U2.14 | length 161.8
  Top Layer w6: v1(106,-12) 110.42,-16.42 U2.14
  Bottom Layer w6: v1(63,-121.57) 89.79,-94.79 ccw(c50.65,-55.65) 106,-55.65 v1(106,-12) v1@106,-10
UWB_EXT: M1.1 U2.11 | length 750.5
  Top Layer w6: M1.1 -434.25,264.25 -319.75,149.75 ; -319.72,149.72 ccw(c-260,209.5) -260,125 67.93,125 cw(c67.93,107.93) 80,120 cw(c67.93,107.93) 85,107.93 85,98.96 ccw(c106.64,98.96) 91.34,83.66 105,70 ccw(c117.07,82.07) 117.07,65 166.93,65 cw(c166.93,45.51) 180.7,59.3 cw(c166.93,45.51) 186.42,45.51 U2.11
UWB_IRQ: M1.22 U2.10 | length 235.5
  Top Layer w6: M1.22 65.98,154.02 95,125 cw(c82.93,112.93) 100,112.93 100,110.61 ccw(c125.61,110.61) 107.5,92.5 115,85 ccw(c127.07,97.07) 127.07,80 180,80 cw(c180,55.86) 197.07,72.93 199.81,70.19 cw(c184.62,55) 206.1,55 U2.10
UWB_RST: M1.3 U2.12 | length 664.5
  Top Layer w6: M1.3 -434.02,154.02 -367.68,87.68 ccw(c-325,130.36) -325,70 65,70 cw(c65,45.86) 82.07,62.93 88.54,56.46 ccw(c104.14,72.07) 104.14,50 146.7,50 cw(c146.7,29.97) 160.87,44.13 166.73,38.27 U2.12
UWB_SCK: M1.20 U2.15 | length 143.9
  Top Layer w6: M1.20 61.22,43.78 77.93,27.07 cw(c60.86,10) 85,10 85,-11.63 ccw(c102.07,-11.63) 90,-23.7 95,-28.7 ccw(c112.87,-10.82) 112.87,-36.1 U2.15
UWB_SDI: M1.18 U2.17 | length 94.7
  Top Layer w6: M1.18@53,-66.46 M1.18@62.02,-75.47 ; M1.18@67.02,-75.47 U2.17 U2.17@149,-75.47
UWB_SDO: M1.19 U2.16 | length 107.9
  Top Layer w6: M1.19 60.67,-11.34 95,-45.67 ccw(c119.43,-21.24) 119.43,-55.79 U2.16
UWB_WAK: M1.2 U2.13 | length 668.2
  Top Layer w6: M1.2 -434.13,209.13 -342.68,117.68 ccw(c-300,160.36) -300,100 v1(0,100) ; v1(105,30) 131.73,3.27 U2.13
  Bottom Layer w6: v1(0,100) 59.95,40.05 ccw(c84.21,64.31) 84.21,30 v1(105,30)
VCAP: C10.1 U2.22 | length 105.2
  Top Layer w10: C10.1 95,-228 95,-196.9 cw(c118,-196.9) 118,-173.9 U2.22
XT_I: C11.2 U2.5 X1.1 | length 238.1
  Top Layer w6: U2.5 cw(c337.19,31) 314.09,54.09 320,60 359.49,99.49 ccw(c334.13,124.86) 370,124.86 cw(c404.14,124.86) 379.98,148.98 ; 380,149 X1.1 412,175 C11.2
XT_O: C12.2 U2.6 X1.3 | length 133.1
  Top Layer w6: U2.6 284.84,115 324,115 X1.3
pads on no net: K1.0 K1.3 K1.NC M1.4 M1.11 S1.0 S1.3 U3.2 U3.3 U3.4 U3.5 U3.6 U3.14 U3.15 U3.16 U3.17 U3.19

## Polygon pours and split planes (outlines as drawn)
GND on Bottom Layer "GND_L02_P004" (solid, remove dead copper, pour order 4): -590.55,-690.99 ccw(c-590.55,-689.98) -590.49,-690.99 -446.67,-690.99 ccw(c-446.67,-659.33) -424.28,-681.72 ccw(c-425,-680.99) -424.28,-681.71 -424.28,-681.72 cw(c-425,-681) -424.29,-681.72 -413.42,-670.86 cw(c-414.14,-670.14) -413.42,-670.86 cw(c-380,-704.28) -380,-657.01 -120,-657.01 cw(c-120,-704.28) -86.58,-670.86 cw(c-85.86,-670.14) -86.58,-670.86 -75.71,-681.72 cw(c-74.99,-681) -75.72,-681.72 ccw(c-53.33,-659.33) -53.36,-690.99 ccw(c-53.33,-689.98) -53.33,-690.99 590.55,-690.99 ccw(c590.55,-591.55) 689.99,-591.57 ccw(c688.98,-591.55) 689.99,-591.55 689.99,589.55 ccw(c688.98,589.55) 689.99,589.58 cw(c590.62,589.56) 689.99,589.55 689.99,589.58 ccw(c590.55,589.55) 590.58,688.99 ccw(c590.56,589.56) 590.55,688.99 cw(c590.55,687.98) 590.58,688.99 590.55,688.99 -590.55,688.99 ccw(c-590.55,687.98) -590.57,688.99 ccw(c-590.55,589.55) -689.99,589.57 ccw(c-688.98,589.55) -689.99,589.55 -689.99,-591.55 ccw(c-688.98,-591.55) -689.99,-591.6 cw(c-590.49,-591.58) -689.99,-591.55 -689.99,-591.6 ccw(c-590.55,-591.55)
no net on Keep-Out Layer "NONET_L-01_P-001" (none, remove dead copper): -590.55,-688.98 -446.67,-688.98 ccw(c-446.67,-658.33) -425,-680 -414.14,-669.14 cw(c-380,-703.28) -380,-655 -120,-655 cw(c-120,-703.28) -85.86,-669.14 -75,-680 ccw(c-53.33,-658.33) -53.33,-688.98 590.55,-688.98 ccw(c590.55,-590.55) 688.98,-590.55 688.98,590.55 ccw(c590.55,590.55) 590.55,688.98 -590.55,688.98 ccw(c-590.55,590.55) -688.98,590.55 -688.98,-590.55 ccw(c-590.55,-590.55)
GND on Top Layer "GND_L01_P003" (solid, remove dead copper, pour order 3): -590.55,-689.99 ccw(c-590.55,-688.98) -590.49,-689.99 -446.67,-689.99 ccw(c-446.67,-658.33) -424.28,-680.72 ccw(c-425,-679.99) -424.28,-680.71 -424.28,-680.72 cw(c-425,-680) -424.29,-680.72 -413.42,-669.86 cw(c-414.14,-669.14) -413.42,-669.86 cw(c-380,-703.28) -380,-656.01 -120,-656.01 cw(c-120,-703.28) -86.58,-669.86 cw(c-85.86,-669.14) -86.58,-669.86 -75.71,-680.72 cw(c-74.99,-680) -75.72,-680.72 ccw(c-53.33,-658.33) -53.36,-689.99 ccw(c-53.33,-688.98) -53.33,-689.99 590.55,-689.99 ccw(c590.55,-590.55) 689.99,-590.57 ccw(c688.98,-590.55) 689.99,-590.55 689.99,590.55 ccw(c688.98,590.55) 689.99,590.58 cw(c590.62,590.56) 689.99,590.55 689.99,590.58 ccw(c590.55,590.55) 590.58,689.99 ccw(c590.56,590.56) 590.55,689.99 cw(c590.55,688.98) 590.58,689.99 590.55,689.99 -590.55,689.99 ccw(c-590.55,688.98) -590.57,689.99 ccw(c-590.55,590.55) -689.99,590.57 ccw(c-688.98,590.55) -689.99,590.55 -689.99,-590.55 ccw(c-688.98,-590.55) -689.99,-590.6 cw(c-590.49,-590.58) -689.99,-590.55 -689.99,-590.6 ccw(c-590.55,-590.55)

## Other copper
Top Layer:
  region net +3V3: -415,50 ccw(c-425,50) -425,60 -530,60 ccw(c-530,50) -540,50 -540,-80 ccw(c-535,-80) -535,-85 -520,-85 cw(c-520,-100) -505,-100 -505,-125 -485,-125 -485,-100 cw(c-470,-100) -470,-85 -425,-85 ccw(c-425,-75) -415,-75
  region net +VBAT: -475,-340 ccw(c-480,-340) -480,-335 -530,-335 ccw(c-530,-340) -535,-340 -535,-350 ccw(c-530,-350) -530,-355 -480,-355 ccw(c-480,-350) -475,-350
  region net +VIN: -295,-333 ccw(c-305,-333) -305,-323 -365,-323 ccw(c-365,-333) -375,-333 -375,-397 ccw(c-365,-397) -365,-407 -329,-407 cw(c-329,-427) -309,-427 -309,-489 ccw(c-304,-489) -304,-494 -298,-494 ccw(c-298,-489) -293,-489 -293,-433 cw(c-281,-433) -281,-421 -230,-421 ccw(c-230,-406) -215,-406 -215,-390 cw(c-207,-390) -207,-382 -132,-382 ccw(c-132,-368) -118,-368 -118,-349 ccw(c-125,-349) -125,-342 -145,-342 ccw(c-145,-349) -152,-349 -152,-364 cw(c-160,-364) -160,-372 -222.59,-372 cw(c-222.59,-368.59) -225,-371 ccw(c-227.41,-373.41) -227.41,-370 -247,-370 ccw(c-247,-378) -255,-378 -255,-401 cw(c-263,-401) -263,-409 -287,-409 cw(c-287,-401) -295,-401
  region net +3V3: -365,-273 ccw(c-365,-281) -373,-281 -373,-302 ccw(c-365,-302) -365,-310 -307,-310 ccw(c-307,-302) -299,-302 -299,-281 ccw(c-307,-281) -307,-273
  region net NetC4_2: -243,-276 ccw(c-243,-284) -251,-284 -251,-302 ccw(c-243,-302) -243,-310 -176,-310 ccw(c-176,-302) -168,-302 -168,-284 ccw(c-176,-284) -176,-276
Bottom Layer:
  region net GND: 230,-60 320,-60 320,-150 230,-150
  region net GND: 565,-130 595,-130 595,-160 565,-160
Multi-Layer:
  pour cut-out: -689.99,590.55 cw(c-590.55,590.55) -590.55,689.99 590.53,689.99 cw(c590.53,590.53) 689.99,590.53 688.98,275 675,290 -675,290 -688.98,275

## Silkscreen, mask and mechanical layers (free items; w line width, h text height)
Top Overlay:
  circle w10: c-645,-100 r30
  circle w16: c400,-415 r8
  region: 150,-425 130,-405 170,-405
  region: 200,-405 220,-425 180,-425
  region: -640,-325 ccw(c-650,-325) -650,-315 -675,-315 ccw(c-675,-325) -685,-325 -685,-410 ccw(c-670,-410) -670,-425 -655,-425 ccw(c-655,-410) -640,-410
  lines w6: 130,-405 170,-405 150,-425 130,-405 ; 180,-425 220,-425 200,-405 180,-425
  lines w8: -665,-120 -625,-80 ; -665,-80 -625,-120
  lines w10: -675,-50 -645,-20 ; -645,-70 -645,-20 ; -615,-50 -645,-20
  text "KitSprout" at 105,351 h160
  text "UWB Node v1.6" at 105,256 h100
  text "X" at -675,0 h120
Bottom Overlay:
  drawing of 3477 lines, arcs and shapes, not listed
  text "Ultra-wideband" at 100,235 h136
  text "Local Positioning Sys." at 100,160 h100
  text "Development Board" at 100,85 h100
  text "STM32F411CE" at 55,-15 h80
  text "MPU9250" at 55,-75 h80
  text "X" at -465,-95 h160
  text "LPS22HB" at 55,-135 h80
  text "UWB DWM1000" at 55,-195 h80
  text "+" at -160,-360 h160
Mechanical 1:
  the board outline again, w2
Mechanical 2:
  lines w2: -688.98,-590.55 ccw(c-688.98,-590.55) -688.98,-590.55 ; -688.98,-590.55 ccw(c-590.55,-590.55) -590.55,-688.98 ; -688.98,-590.55 ccw(c-590.55,-590.55) -590.55,-688.98 ; -688.98,-590.55 -688.98,291.58 ; -688.98,291.58 -688.98,590.55 ; -688.98,291.58 688.98,291.58 ; -688.98,590.55 cw(c-590.55,590.55) -590.55,688.98 ; -688.98,590.55 cw(c-590.55,590.55) -590.55,688.98 ; -590.55,-688.98 -446.67,-688.98 ; -590.55,-688.98 -446.67,-688.98 ; -590.55,688.98 590.55,688.98 ; -590.55,688.98 590.55,688.98 ; -446.67,-688.98 ccw(c-446.67,-658.33) -425,-680 ; -446.67,-688.98 ccw(c-446.67,-658.33) -425,-680 ; -425,-680 -414.14,-669.14 ; -425,-680 -414.14,-669.14 ; -414.14,-669.14 cw(c-380,-703.28) -380,-655 ; -414.14,-669.14 cw(c-380,-703.28) -380,-655 ; -380,-655 -120,-655 ; -380,-655 -120,-655 ; -120,-655 cw(c-120,-703.28) -85.86,-669.14 ; -120,-655 cw(c-120,-703.28) -85.86,-669.14 ; -85.86,-669.14 -75,-680 ; -85.86,-669.14 -75,-680 ; -75,-680 ccw(c-53.33,-658.33) -53.33,-688.98 ; -75,-680 ccw(c-53.33,-658.33) -53.33,-688.98 ; -53.33,-688.98 590.55,-688.98 ; -53.33,-688.98 590.55,-688.98 ; 590.55,-688.98 ccw(c590.55,-590.55) 688.98,-590.55 ; 590.55,-688.98 ccw(c590.55,-590.55) 688.98,-590.55 ; 590.55,688.98 cw(c590.55,590.55) 688.98,590.55 ; 590.55,688.98 cw(c590.55,590.55) 688.98,590.55 ; 688.98,-590.56 ccw(c688.98,-590.55) 688.98,-590.55 ; 688.98,-590.55 688.98,291.57 ; 688.98,291.57 688.98,590.55 ; -960,-960 0,-960 960,-960 960,0 960,960 0,960 -960,960 -960,0 -960,-960
T-Component:
  circle w2: c590.55,-590.55 r130
  circle w2: c-590.55,-590.55 r130
  circle w2: c-590.55,590.55 r130
  circle w2: c590.55,590.55 r130

## Dimensions
-688.98,590.55 to 688.98,590.55 on Mechanical 2
590.55,688.98 to 590.55,-688.98 on Mechanical 2
-590.55,590.55 to 590.55,590.55 on Mechanical 2
590.55,590.55 to 590.55,-590.55 on Mechanical 2